# EAGLE board Ingenious Kieran-Curcan (EAGLE 9.7.0)

Size 111.77 x 75.84 mm. Coordinates in mm from the lower left corner, seen from the top.
Outline: 0,0 111.77,0 111.77,75.84 0,75.84 0,0
Copper layers (1*16): Top 0.035mm / dielectric 1.5mm / Bottom 0.035mm
Design rules "default": minimum track width 6mil, minimum drill 0.35mm, track to track 6mil, track to pad 6mil, pad to pad 6mil, via to via 6mil, smd to smd 6mil, copper to edge 40mil, drill to drill 6mil, minimum pad ring 10mil, minimum via ring 8mil, stop-mask expansion 4mil, vias tented up to drill 0mil, thermal gap 10mil

## Footprints (pad centres in the part's own frame; a part is rotated, then mirrored left to right if it is on the bottom)
BATTERY-GENERIC = drill 1.118 pad 3.15 octagon: + 2.54,0; - -2.54,0
RESAD1016W63L850D250B = drill 0.83 pad 1.43: 1 -5.08,0; 2 5.08,0
TO92 = drill 0.813 octagon: 1 -1.27,0; 2 0,1.905; 3 1.27,0
TO220BV = drill 1.016 long: D 0,-2.54; G -2.54,-2.54; S 2.54,-2.54
DIODE-AXIAL = drill 1: 1 -5.08,0; 2 5.08,0

## Placement (x,y rotation side)
P1  BATTERYGENERIC  [BATTERY-GENERIC]  8.26,67.58 180 top
R1  1k  [RESAD1016W63L850D250B]  61.14,24.25 270 top
R2  5k  [RESAD1016W63L850D250B]  104.32,24.25 90 top
R3  4.4k  [RESAD1016W63L850D250B]  101.78,24.25 90 top
T2  PNP  [TO92]  76.38,34.41 0 top
T5  PMOSFET  [TO220BV]  103.26,64.33 0 top
U2  ZENER_DIODE-AXIAL  [DIODE-AXIAL]  61.14,9.01 90 top

## Library data of the parts
P1 R1-R3 U2 = Tinkercad
T2 = Tinkercad; CATEGORY: Transistor; SUB-CATEGORY: BJT; TYPE: PNP
T5 = Tinkercad; CATEGORY: Transistor; SUB-CATEGORY: MOSFET; TYPE: P-Channel

## Nets
P1+: P1.+ R1.1 T2.1 T5.S
P1-: P1.- R2.1 R3.1 U2.1
T2_B: R1.2 T2.2 U2.2
T2_C: R3.2 T2.3 T5.G
T5_D: R2.2 T5.D

## Tracks (layer width: path | path; a pad name or v marks a point on that pad's centre or on a via)
P1+  (3 unrouted)
P1-  (3 unrouted)
T2_B  (2 unrouted)
T2_C  (2 unrouted)
T5_D  (1 unrouted)